# Altium PCB Camera-Sensor-Project.PcbDoc (part 1 of 2)
Units mm, origin at the board's own origin, x right, y up, seen from the top; angles counter-clockwise.
Board outline 82.2 x 56.7 mm, 8 copper layers (Top Layer, Layer 1, Layer 2, Layer 3, Layer 11, Layer 12, Layer 13, Layer 14), stack 1.544 mm thick; 45 components, 37 nets, 231 pads, 10 vias.
Unrouted connection lines stored in the file: 172.
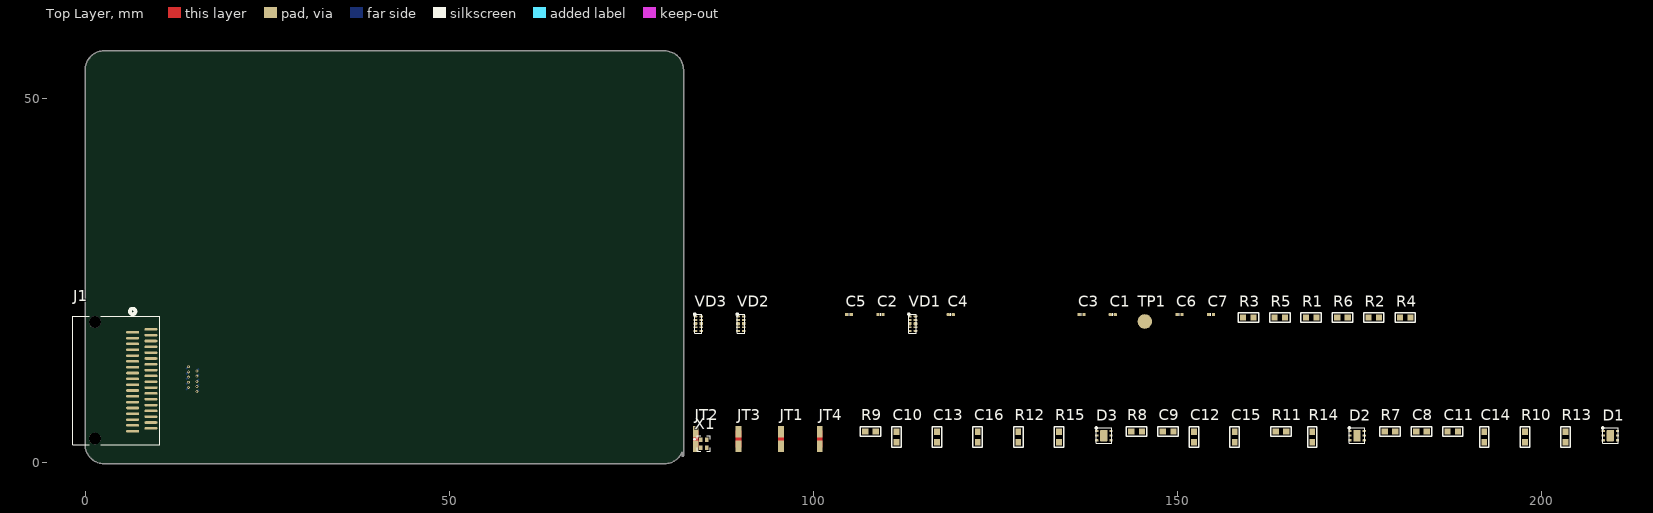
[diagram p0: Top Layer view]
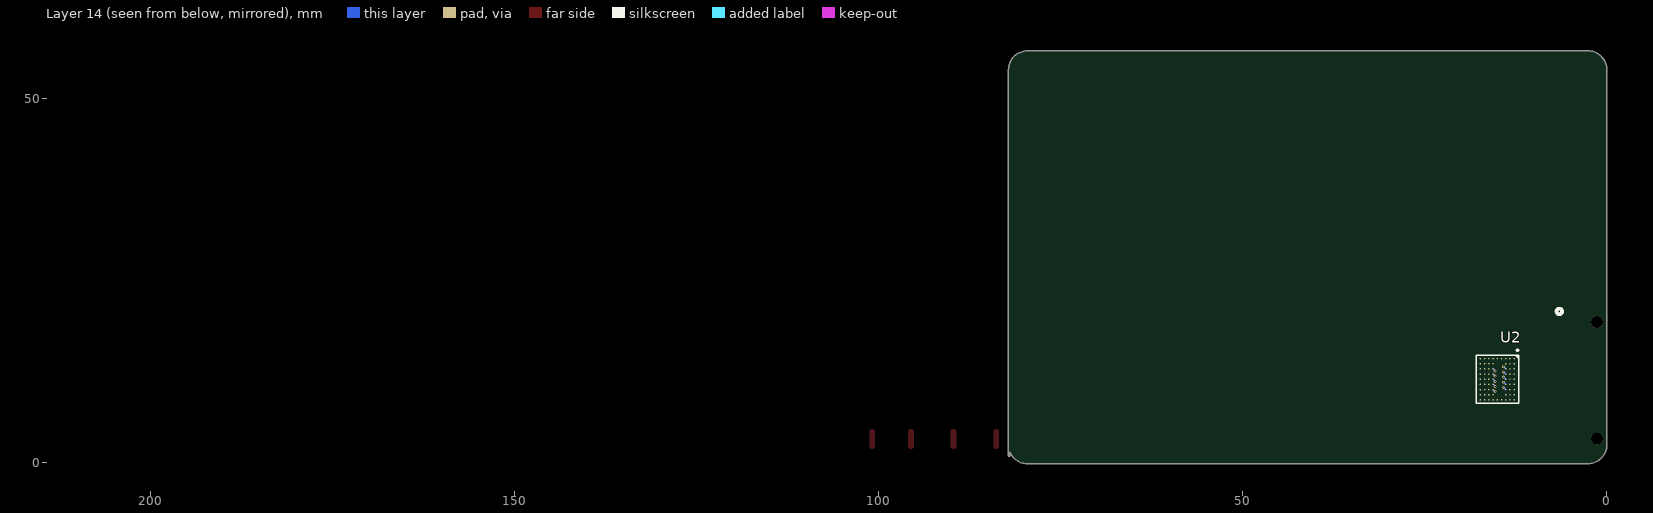
[diagram p1: Layer 14 view, seen from below]

## Layer stack, top to bottom
Board Layer Stack Top Solder: solder mask 0.0254, SM-001, Dk 4
Top Layer: signal copper 0.018
Dielectric 1: prepreg 0.125, FR4 HiTg170 2116, Dk 5.1
Layer 1: signal copper 0.018
Dielectric 4: core 0.3, FR4 HiTg170, Dk 4.5
Layer 2: signal copper 0.018
Dielectric 5: prepreg 0.125, FR4 HiTg170 2116, Dk 5.1
Layer 3: signal copper 0.018
Dielectric 2: core 0.3, FR4 HiTg170, Dk 4.5
Layer 11: signal copper 0.018
Dielectric 10: prepreg 0.125, FR4 HiTg170 2116, Dk 5.1
Layer 12: signal copper 0.018
Dielectric 11: core 0.3, FR4 HiTg170, Dk 4.5
Layer 13: signal copper 0.018
Dielectric 3: prepreg 0.125, FR4 HiTg170 2116, Dk 5.1
Layer 14: signal copper 0.018
Bottom Solder: solder mask 0.0254, SM-001, Dk 4

## Board outline
-0.1,2.499 -0.1,54 cw(c2.5,54) 2.5,56.6 22.25,56.6 79.5,56.6 cw(c79.5,54) 82.1,54 82.1,53.999 82.1,2.5 82.1,1 cw(c82,1) 81.9,1 81.9,1.498 cw(c79.5,2.5) 79.5,-0.1 2.501,-0.1 2.5,-0.1 cw(c2.5,2.5)

## Design rules (kind name [scope] priority, off if disabled: settings)
AcuteAngle [All] p1 off: minimum=3.50000000000000E+0001 checktracksonly=FALSE
AssemblyTestPointUsage "AssemblyTestPointUsage; Autogenerated; Do Not Use" [All] p1 off:
AssemblyTestPointUsage [All] p2:
AssemblyTestpoint "AssemblyTestpoint; Autogenerated; Do Not Use" [All] p1 off: testpointundercomponent=TRUE minsize=1.016 maxsize=2.54 preferedsize=1.524 minholesize=0 maxholesize=1.016 preferedholesize=0.813 testpointgrid=0.025 usegrid=TRUE gridtolerance=0 allowsidetop=TRUE allowsidebottom=TRUE
AssemblyTestpoint [All] p2: testpointundercomponent=TRUE minsize=1.016 maxsize=2.54 preferedsize=1.524 minholesize=0 maxholesize=1.016 preferedholesize=0.813 testpointgrid=0.025 usegrid=TRUE gridtolerance=0 allowsidetop=TRUE allowsidebottom=TRUE
BoardOutlineClearance "BoardOutlineClearance; Custom; Object: Silkscreen Layers; Constraints: 0mm" [OnLayer('Top Overlay') or OnLayer('Bottom Overlay')] p1: gap=0 ignorepadtopadclearanceinfootprint=FALSE
BoardOutlineClearance "BoardOutlineClearance; Rezonit; Advanced; Milling; Object: All" [All] p2: gap=0.25 ignorepadtopadclearanceinfootprint=FALSE
BoardOutlineClearance "BoardOutlineClearance; Rezonit; Advanced; V-Cut; Object: All" [All] p3 off: gap=0.4 ignorepadtopadclearanceinfootprint=FALSE
BoardOutlineClearance "BoardOutlineClearance; Rezonit; Standard; Milling; Object: OnLayer" [OnLayer('Top Overlay') or OnLayer('Bottom Overlay')] p4: gap=0 ignorepadtopadclearanceinfootprint=FALSE
BoardOutlineClearance "BoardOutlineClearance; Rezonit; Standard; Milling; Object: All" [All] p5 off: gap=0.25 ignorepadtopadclearanceinfootprint=FALSE
BoardOutlineClearance "BoardOutlineClearance; Rezonit; Standard; V-Cut; Object: All" [All] p6: gap=0.4 ignorepadtopadclearanceinfootprint=FALSE
Clearance "Clearance; Rezonit; Advanced; Object: Pad Non Plated" [(IsPad = True) and (PadIsPlated = 'False')] p1: gap=0 ignorepadtopadclearanceinfootprint=FALSE except(0.2: Arc-Hole Track-Hole SMDPad-Hole THPad-Hole Via-Hole Fill-Hole Poly-Hole Region-Hole Text-Hole)
Clearance "Clearance; Rezonit; Advanced; Copper: 105um; First Object: ExistsOnLayer; Second Object: ExistsOnLayer" [( ExistsOnLayer('105um Layer <N>') or ExistsOnLayer('105um Layer <M>') ) vs ( ExistsOnLayer('105um Layer <N>') or ExistsOnLayer('105um Layer <M>') )] p2 off: gap=0.35 ignorepadtopadclearanceinfootprint=FALSE except(0.25: Arc-Hole Track-Hole SMDPad-Hole THPad-Hole Via-Hole Fill-Hole Poly-Hole Region-Hole Text-Hole) // Through Hole Primitive to any other Primitive
Clearance "Clearance; Rezonit; Advanced; Copper: 70um; First Object: ExistsOnLayer; Second Object: ExistsOnLayer" [( ExistsOnLayer('70um Layer <N>') or ExistsOnLayer('70um Layer <M>') ) vs ( ExistsOnLayer('70um Layer <N>') or ExistsOnLayer('70um Layer <M>') )] p3 off: gap=0.3 ignorepadtopadclearanceinfootprint=FALSE except(0.25: Arc-Hole Track-Hole SMDPad-Hole THPad-Hole Via-Hole Fill-Hole Poly-Hole Region-Hole Text-Hole) // Through Hole Primitive to any other Primitive
Clearance "Clearance; Custom; First Object: InPolygon & StitchingVia; Second Object: Nets; Constraints: 0.6mm" [InPolygon or IsStitchingVia vs InDifferentialPairClass('DifferentialPairClassName') or InNetClass('NetClassName')] p4: gap=0.2 ignorepadtopadclearanceinfootprint=FALSE except(0: Arc-Arc Arc-Track Arc-SMDPad Arc-THPad Arc-Text Arc-Hole Track-Track Track-SMDPad Track-THPad Track-Text Track-Hole SMDPad-SMDPad SMDPad-THPad SMDPad-Text SMDPad-Hole THPad-THPad THPad-Text THPad-Hole Text-Text Text-Hole; 0.125: SMDPad-Via THPad-Via Via-Via Via-Text; 0.25: Via-Hole Fill-Hole Poly-Hole Region-Hole; 0.6: Arc-Via Arc-Fill Arc-Poly Arc-Region Track-Via Track-Fill Track-Poly Track-Region) // 18um example
Clearance "Clearance; Rezonit; Advanced; Copper: 35um; First Object: ExistsOnLayer; Second Object: ExistsOnLayer" [( ExistsOnLayer('35um Layer <N>') or ExistsOnLayer('35um Layer <M>') ) vs ( ExistsOnLayer('35um Layer <N>') or ExistsOnLayer('35um Layer <M>') )] p5 off: gap=0.2 ignorepadtopadclearanceinfootprint=FALSE except(0.15: Arc-Arc Arc-Track Arc-SMDPad Arc-THPad Arc-Via Arc-Text Track-Track Track-SMDPad Track-THPad Track-Via Track-Text SMDPad-SMDPad SMDPad-THPad SMDPad-Via SMDPad-Text THPad-THPad THPad-Via THPad-Text Via-Via Via-Text Text-Text; 0.25: Arc-Hole Track-Hole SMDPad-Hole THPad-Hole Via-Hole Fill-Hole Poly-Hole Region-Hole Text-Hole) // Through Hole Primitive to any other Primitive
Clearance "Clearance; Custom; First Object: Keepout; Second Object: All; Constraints: 0.01mm" [All vs IsKeepOut] p6: gap=0.01 ignorepadtopadclearanceinfootprint=FALSE
Clearance "Clearance; Rezonit; Advanced; Copper: 18um; First Object: ExistsOnLayer; Second Object: ExistsOnLayer" [All] p7: gap=0.15 ignorepadtopadclearanceinfootprint=FALSE except(0.1: Arc-Arc Arc-Track Arc-SMDPad Arc-THPad Arc-Via Arc-Text Track-Track Track-SMDPad Track-THPad Track-Via Track-Text SMDPad-SMDPad SMDPad-THPad SMDPad-Via SMDPad-Text THPad-THPad THPad-Via THPad-Text Via-Via Via-Text Text-Text; 0.25: Arc-Hole Track-Hole SMDPad-Hole THPad-Hole Via-Hole Fill-Hole Poly-Hole Region-Hole Text-Hole) // Through Hole Primitive to any other Primitive
Clearance "Clearance; Rezonit; Standard; Object: Pad Non Plated" [(IsPad = True) and (PadIsPlated = 'False')] p8: gap=0 ignorepadtopadclearanceinfootprint=FALSE except(0.2: Arc-Hole Track-Hole SMDPad-Hole THPad-Hole Via-Hole Fill-Hole Poly-Hole Region-Hole Text-Hole)
Clearance "Clearance; Rezonit; Standard; Copper: 105um; First Object: ExistsOnLayer; Second Object: ExistsOnLayer" [( ExistsOnLayer('105um Layer 1') or ExistsOnLayer('105um Layer 2') ) vs ( ExistsOnLayer('105um Layer 1') or ExistsOnLayer('105um Layer 2') )] p9 off: gap=0.35 ignorepadtopadclearanceinfootprint=FALSE except(0.25: Arc-Hole Track-Hole SMDPad-Hole THPad-Hole Via-Hole Fill-Hole Poly-Hole Region-Hole Text-Hole) // Through Hole Primitive to any other Primitive
Clearance "Clearance; Rezonit; Standard; Copper: 70um; First Object: ExistsOnLayer; Second Object: ExistsOnLayer" [( ExistsOnLayer('70um Layer 1') or ExistsOnLayer('70um Layer 2') ) vs ( ExistsOnLayer('70um Layer 1') or ExistsOnLayer('70um Layer 2') )] p10 off: gap=0.3 ignorepadtopadclearanceinfootprint=FALSE except(0.25: Arc-Hole Track-Hole SMDPad-Hole THPad-Hole Via-Hole Fill-Hole Poly-Hole Region-Hole Text-Hole) // Through Hole Primitive to any other Primitive
Clearance "Clearance; Rezonit; Standard; Copper: 35um; First Object: ExistsOnLayer; Second Object: ExistsOnLayer" [( ExistsOnLayer('35um Layer 1') or ExistsOnLayer('35um Layer 2') ) vs ( ExistsOnLayer('35um Layer 1') or ExistsOnLayer('35um Layer 2') )] p11 off: gap=0.2 ignorepadtopadclearanceinfootprint=FALSE except(0.25: Arc-Hole Track-Hole SMDPad-Hole THPad-Hole Via-Hole Fill-Hole Poly-Hole Region-Hole Text-Hole) // Through Hole Primitive to any other Primitive
Clearance "Clearance; Rezonit; Standard; Copper: 18um; First Object: ExistsOnLayer; Second Object: ExistsOnLayer" [( ExistsOnLayer('18um Layer 1') or ExistsOnLayer('18um Layer 2') ) vs ( ExistsOnLayer('18um Layer 1') or ExistsOnLayer('18um Layer 2') )] p12: gap=0.2 ignorepadtopadclearanceinfootprint=FALSE except(0.125: Arc-Arc Arc-Track Arc-SMDPad Arc-THPad Arc-Via Arc-Text Track-Track Track-SMDPad Track-THPad Track-Via Track-Text SMDPad-SMDPad SMDPad-THPad SMDPad-Via SMDPad-Text THPad-THPad THPad-Via THPad-Text Via-Via Via-Text Text-Text; 0.25: Arc-Hole Track-Hole SMDPad-Hole THPad-Hole Via-Hole Fill-Hole Poly-Hole Region-Hole Text-Hole) // Through Hole Primitive to any other Primitive
ComponentClearance "ComponentClearance; Rezonit; Autoassembly; Object: All" [All] p1: gap=0.2 collisioncheckmode=3 verticalgap=0.2 showdistances=FALSE
ComponentClearance "ComponentClearance; Rezonit; Autoassembly" [All] p2: gap=0.2 collisioncheckmode=3 verticalgap=0.2 showdistances=FALSE
Creepage "Creepage; Autogenerated; Do Not Use" [All] p1 off: checkdistance=0.254 applytopolygonpour=TRUE
Creepage [All] p2 off: checkdistance=0.254 applytopolygonpour=TRUE
DiffPairsRouting "DiffPairsRouting; Autogenerated; Do Not Use" [All] p1 off: maxlimit=0.254 minlimit=0.254 mostfreqgap=0.254 toplayer_minwidth=0.381 toplayer_maxwidth=0.381 toplayer_prefwidth=0.381 midlayer1_minwidth=0.381 midlayer1_maxwidth=0.381 midlayer1_prefwidth=0.381 midlayer2_minwidth=0.381 midlayer2_maxwidth=0.381 midlayer2_prefwidth=0.381 midlayer6_minwidth=0.381 midlayer6_maxwidth=0.381 midlayer6_prefwidth=0.381 midlayer10_minwidth=0.381 midlayer10_maxwidth=0.381 midlayer10_prefwidth=0.381 midlayer11_minwidth=0.381 midlayer11_maxwidth=0.381 midlayer11_prefwidth=0.381 midlayer12_minwidth=0.381 midlayer12_maxwidth=0.381 midlayer12_prefwidth=0.381 bottomlayer_minwidth=0.381 bottomlayer_maxwidth=0.381 bottomlayer_prefwidth=0.381 maxuncoupledlength=12.7
DiffPairsRouting [All] p2: maxlimit=0.254 minlimit=0.254 mostfreqgap=0.254 toplayer_minwidth=0.381 toplayer_maxwidth=0.381 toplayer_prefwidth=0.381 midlayer1_minwidth=0.381 midlayer1_maxwidth=0.381 midlayer1_prefwidth=0.381 midlayer2_minwidth=0.381 midlayer2_maxwidth=0.381 midlayer2_prefwidth=0.381 midlayer6_minwidth=0.381 midlayer6_maxwidth=0.381 midlayer6_prefwidth=0.381 midlayer10_minwidth=0.381 midlayer10_maxwidth=0.381 midlayer10_prefwidth=0.381 midlayer11_minwidth=0.381 midlayer11_maxwidth=0.381 midlayer11_prefwidth=0.381 midlayer12_minwidth=0.381 midlayer12_maxwidth=0.381 midlayer12_prefwidth=0.381 bottomlayer_minwidth=0.381 bottomlayer_maxwidth=0.381 bottomlayer_prefwidth=0.381 maxuncoupledlength=12.7
FabricationTestPointUsage "FabricationTestPointUsage; Autogenerated; Do Not Use" [All] p1 off: valid=0 allowmultiple=FALSE
FabricationTestPointUsage [All] p2: valid=0 allowmultiple=FALSE
FabricationTestpoint "FabricationTestpoint; Autogenerated; Do Not Use" [All] p1 off: side=3 testpointundercomponent=TRUE minsize=1.016 maxsize=2.54 preferedsize=1.524 minholesize=0 maxholesize=1.016 preferedholesize=0.813 testpointgrid=0.025 allowsidetop=TRUE allowsidebottom=TRUE usegrid=TRUE gridtolerance=0
FabricationTestpoint [All] p2: side=3 testpointundercomponent=TRUE minsize=1.016 maxsize=2.54 preferedsize=1.524 minholesize=0 maxholesize=1.016 preferedholesize=0.813 testpointgrid=0.025 allowsidetop=TRUE allowsidebottom=TRUE usegrid=TRUE gridtolerance=0
FanoutControl "Fanout_BGA; Autogenerated; Do Not Use" [IsBGA] p1 off: bgadir=Out bgaviamode=Centered fanoutstyle=Auto fanoutdirection=Alternating viagrid=0.025 // Fanout_BGA (Default Rule)
FanoutControl "Fanout_LCC; Autogenerated; Do Not Use" [IsLCC] p2 off: bgadir=Out bgaviamode=Centered fanoutstyle=Auto fanoutdirection=Alternating viagrid=0.025 // Fanout_LCC (Default Rule)
FanoutControl "Fanout_SOIC; Autogenerated; Do Not Use" [IsSOIC] p3 off: bgadir=Out bgaviamode=Centered fanoutstyle=Auto fanoutdirection=Alternating viagrid=0.025 // Fanout_SOIC (Default Rule)
FanoutControl "Fanout_Small; Autogenerated; Do Not Use" [(CompPinCount < 5)] p4 off: bgadir=Out bgaviamode=Centered fanoutstyle=Auto fanoutdirection=OutThenIn viagrid=0.025 // Fanout_Small (Default Rule)
FanoutControl "Fanout_Default; Autogenerated; Do Not Use" [All] p5 off: bgadir=Out bgaviamode=Centered fanoutstyle=BGA fanoutdirection=Alternating viagrid=0.025 // Fanout_Default (Default Rule)
FanoutControl Fanout_BGA [IsBGA] p6: bgadir=Out bgaviamode=Centered fanoutstyle=Auto fanoutdirection=Alternating viagrid=0.025 // Fanout_BGA (Default Rule)
FanoutControl Fanout_LCC [IsLCC] p7: bgadir=Out bgaviamode=Centered fanoutstyle=Auto fanoutdirection=Alternating viagrid=0.025 // Fanout_LCC (Default Rule)
FanoutControl Fanout_SOIC [IsSOIC] p8: bgadir=Out bgaviamode=Centered fanoutstyle=Auto fanoutdirection=Alternating viagrid=0.025 // Fanout_SOIC (Default Rule)
FanoutControl Fanout_Small [(CompPinCount < 5)] p9: bgadir=Out bgaviamode=Centered fanoutstyle=Auto fanoutdirection=OutThenIn viagrid=0.025 // Fanout_Small (Default Rule)
FanoutControl Fanout_Default [All] p10: bgadir=Out bgaviamode=Centered fanoutstyle=BGA fanoutdirection=Alternating viagrid=0.025 // Fanout_Default (Default Rule)
Height "Height; Autogenerated; Do Not Use" [All] p1 off: minheight=0 maxheight=25.4 prefheight=12.7
Height [All] p2: minheight=0 maxheight=25.4 prefheight=12.7
HoleSize "HoleSize; Rezonit; Advanced; Object: Blind/Buried VIA" [(ObjectKind = 'Via') And (DrillPair <> 'Layer Top Layer - Layer Bottom Layer')] p1: absolutevalues=TRUE maxlimit=0.5 minlimit=0.2 maxpercent=80.000 minpercent=20.000
HoleSize "HoleSize; Rezonit; Advanced; Object: VIA" [IsVia] p2: absolutevalues=TRUE maxlimit=5 minlimit=0.2 maxpercent=80.000 minpercent=20.000
HoleSize "HoleSize; Rezonit; Advanced; Object: Pad Non Plated" [(IsPad = True) and (PadIsPlated = 'False')] p3: absolutevalues=TRUE maxlimit=5 minlimit=0.5 maxpercent=80.000 minpercent=20.000
HoleSize "HoleSize; Rezonit; Advanced; Object: Pad Plated" [(IsPad = True) and (PadIsPlated = 'True')] p4: absolutevalues=TRUE maxlimit=5 minlimit=0.6 maxpercent=80.000 minpercent=20.000
HoleSize "HoleSize; Rezonit; Standard; Object: VIA" [IsVia] p5: absolutevalues=TRUE maxlimit=5.9 minlimit=0.3 maxpercent=80.000 minpercent=20.000
HoleSize "HoleSize; Rezonit; Standard; Object: Pad Non Plated" [(IsPad = True) and (PadIsPlated = 'False')] p6: absolutevalues=TRUE maxlimit=5.9 minlimit=0.5 maxpercent=80.000 minpercent=20.000
HoleSize "HoleSize; Rezonit; Standard; Object: Pad Plated" [(IsPad = True) and (PadIsPlated = 'True')] p7: absolutevalues=TRUE maxlimit=5.9 minlimit=0.6 maxpercent=80.000 minpercent=20.000
HoleToHoleClearance "HoleToHoleClearance; Rezonit; Advanced" [All] p1: gap=0.2 allowstackedmicrovias=TRUE
HoleToHoleClearance "HoleToHoleClearance; Rezonit; Standard" [All] p2: gap=0.2 allowstackedmicrovias=TRUE
LayerPairs "LayerPairs; Autogenerated; Do Not Use" [All] p1 off: enforce=TRUE
LayerPairs [All] p2: enforce=TRUE
MinimumAnnularRing "MinimumAR; Rezonit; Advanced; Object: VIA" [IsVia] p1: minimumring=0.1
MinimumAnnularRing "MinimumAR; Rezonit; Advanced; Object: Pad Plated" [(IsPad = True) and (PadIsPlated = 'True')] p2: minimumring=0.15
MinimumAnnularRing "MinimumAR; Rezonit; Standard; Object: VIA" [IsVia] p3: minimumring=0.15
MinimumAnnularRing "MinimumAR; Rezonit; Standard; Object: Pad Plated" [(IsPad = True) and (PadIsPlated = 'True')] p4: minimumring=0.2
MinimumSolderMaskSliver "SolderMaskBridge; Rezonit; Advanced; Green; Copper: 105um; First Object: ExistsOnLayer; Second Object: ExistsOnLayer" [ExistsOnLayer('105um Layer Top or Bottom') or ExistsOnLayer('105um Layer Bottom or Top') vs ExistsOnLayer('105um Layer Top or Bottom') or ExistsOnLayer('105um Layer Bottom or Top')] p1 off: minsoldermaskwidth=0.15 // Dk=3.5
MinimumSolderMaskSliver "SolderMaskBridge; Rezonit; Advanced; Green; Copper: 70um; First Object: ExistsOnLayer; Second Object: ExistsOnLayer" [ExistsOnLayer('70um Layer Top or Bottom') or ExistsOnLayer('70um Layer Bottom or Top') vs ExistsOnLayer('70um Layer Top or Bottom') or ExistsOnLayer('70um Layer Bottom or Top')] p2 off: minsoldermaskwidth=0.15 // Dk=3.5
MinimumSolderMaskSliver "SolderMaskBridge; Rezonit; Advanced; Green; Copper: 35um; First Object: ExistsOnLayer; Second Object: ExistsOnLayer" [ExistsOnLayer('35um Layer Top or Bottom') or ExistsOnLayer('35um Layer Bottom or Top') vs ExistsOnLayer('35um Layer Top or Bottom') or ExistsOnLayer('35um Layer Bottom or Top')] p3 off: minsoldermaskwidth=0.1 // Dk=3.5
MinimumSolderMaskSliver "SolderMaskBridge; Rezonit; Advanced; Green; Copper: 18um; First Object: ExistsOnLayer; Second Object: ExistsOnLayer" [ExistsOnLayer('18um Layer Top or Bottom') or ExistsOnLayer('18um Layer Bottom or Top') vs ExistsOnLayer('18um Layer Top or Bottom') or ExistsOnLayer('18um Layer Bottom or Top')] p4: minsoldermaskwidth=0.1 // Dk=3.5
MinimumSolderMaskSliver "SolderMaskBridge; Rezonit; Advanced; Color; Copper: 105um; First Object: ExistsOnLayer; Second Object: ExistsOnLayer" [ExistsOnLayer('105um Layer Top or Bottom') or ExistsOnLayer('105um Layer Bottom or Top') vs ExistsOnLayer('105um Layer Top or Bottom') or ExistsOnLayer('105um Layer Bottom or Top')] p5 off: minsoldermaskwidth=0.175 // Dk=3.5
MinimumSolderMaskSliver "SolderMaskBridge; Rezonit; Advanced; Color; Copper: 70um; First Object: ExistsOnLayer; Second Object: ExistsOnLayer" [ExistsOnLayer('70um Layer Top or Bottom') or ExistsOnLayer('70um Layer Bottom or Top') vs ExistsOnLayer('70um Layer Top or Bottom') or ExistsOnLayer('70um Layer Bottom or Top')] p6 off: minsoldermaskwidth=0.175 // Dk=3.5
MinimumSolderMaskSliver "SolderMaskBridge; Rezonit; Advanced; Color; Copper: 35um; First Object: ExistsOnLayer; Second Object: ExistsOnLayer" [ExistsOnLayer('35um Layer Top or Bottom') or ExistsOnLayer('35um Layer Bottom or Top') vs ExistsOnLayer('35um Layer Top or Bottom') or ExistsOnLayer('35um Layer Bottom or Top')] p7 off: minsoldermaskwidth=0.15 // Dk=3.5
MinimumSolderMaskSliver "SolderMaskBridge; Rezonit; Advanced; Color; Copper: 18um; First Object: ExistsOnLayer; Second Object: ExistsOnLayer" [ExistsOnLayer('18um Layer Top or Bottom') or ExistsOnLayer('18um Layer Bottom or Top') vs ExistsOnLayer('18um Layer Top or Bottom') or ExistsOnLayer('18um Layer Bottom or Top')] p8 off: minsoldermaskwidth=0.15 // Dk=3.5
MinimumSolderMaskSliver "SolderMaskBridge; Rezonit; Standard; Green; Copper: 105um; First Object: ExistsOnLayer; Second Object: ExistsOnLayer" [ExistsOnLayer('105um Layer Top or Bottom') or ExistsOnLayer('105um Layer Bottom or Top') vs ExistsOnLayer('105um Layer Top or Bottom') or ExistsOnLayer('105um Layer Bottom or Top')] p9 off: minsoldermaskwidth=0.175
MinimumSolderMaskSliver "SolderMaskBridge; Rezonit; Standard; Green; Copper: 70um; First Object: ExistsOnLayer; Second Object: ExistsOnLayer" [ExistsOnLayer('70um Layer Top or Bottom') or ExistsOnLayer('70um Layer Bottom or Top') vs ExistsOnLayer('70um Layer Top or Bottom') or ExistsOnLayer('70um Layer Bottom or Top')] p10 off: minsoldermaskwidth=0.175
MinimumSolderMaskSliver "SolderMaskBridge; Rezonit; Standard; Green; Copper: 35um; First Object: ExistsOnLayer; Second Object: ExistsOnLayer" [ExistsOnLayer('35um Layer Top or Bottom') or ExistsOnLayer('35um Layer Bottom or Top') vs ExistsOnLayer('35um Layer Top or Bottom') or ExistsOnLayer('35um Layer Bottom or Top')] p11 off: minsoldermaskwidth=0.15
MinimumSolderMaskSliver "SolderMaskBridge; Rezonit; Standard; Green; Copper: 18um; First Object: ExistsOnLayer; Second Object: ExistsOnLayer" [ExistsOnLayer('18um Layer Top or Bottom') or ExistsOnLayer('18um Layer Bottom or Top') vs ExistsOnLayer('18um Layer Top or Bottom') or ExistsOnLayer('18um Layer Bottom or Top')] p12: minsoldermaskwidth=0.15
MinimumSolderMaskSliver "SolderMaskBridge; Rezonit; Standard; Color; Copper: 105um; First Object: ExistsOnLayer; Second Object: ExistsOnLayer" [ExistsOnLayer('105um Layer Top or Bottom') or ExistsOnLayer('105um Layer Bottom or Top') vs ExistsOnLayer('105um Layer Top or Bottom') or ExistsOnLayer('105um Layer Bottom or Top')] p13 off: minsoldermaskwidth=0.175
MinimumSolderMaskSliver "SolderMaskBridge; Rezonit; Standard; Color; Copper: 70um; First Object: ExistsOnLayer; Second Object: ExistsOnLayer" [ExistsOnLayer('70um Layer Top or Bottom') or ExistsOnLayer('70um Layer Bottom or Top') vs ExistsOnLayer('70um Layer Top or Bottom') or ExistsOnLayer('70um Layer Bottom or Top')] p14 off: minsoldermaskwidth=0.175
MinimumSolderMaskSliver "SolderMaskBridge; Rezonit; Standard; Color; Copper: 35um; First Object: ExistsOnLayer; Second Object: ExistsOnLayer" [ExistsOnLayer('35um Layer Top or Bottom') or ExistsOnLayer('35um Layer Bottom or Top') vs ExistsOnLayer('35um Layer Top or Bottom') or ExistsOnLayer('35um Layer Bottom or Top')] p15 off: minsoldermaskwidth=0.15
MinimumSolderMaskSliver "SolderMaskBridge; Rezonit; Standard; Color; Copper: 18um; First Object: ExistsOnLayer; Second Object: ExistsOnLayer" [ExistsOnLayer('18um Layer Top or Bottom') or ExistsOnLayer('18um Layer Bottom or Top') vs ExistsOnLayer('18um Layer Top or Bottom') or ExistsOnLayer('18um Layer Bottom or Top')] p16 off: minsoldermaskwidth=0.15
NetAntennae "NetAntennae; Custom; Object: All; Constraints: 0mm" [All] p1: netantennaetolerance=0
NetAntennae [All] p2: netantennaetolerance=0
PasteMaskExpansion "PasteMaskExpansion; Custom; Object: Multi-Layer; Constraints: No Paste" [OnLayer('Multi-Layer')] p1: expansion=-2539.975 usepaste=FALSE
PasteMaskExpansion "PasteMaskExpansion; Custom; Object: Test Points; Constraints: No Paste" [(ObjectKind = 'Pad') And ((TestpointAssyTop = 'True') Or (TestpointAssyBottom = 'True'))] p2: expansion=-2539.975 usepaste=FALSE
PasteMaskExpansion "PasteMaskExpansion; Custom; Object: All; Constrains: 100%" [All] p3: expansion=0
PasteMaskExpansion "PasteMaskExpansion; Custom; Object: EPAD; Constraints: -50%" [HasPad('*EPAD')] p4: expansion=0 percent=-50.000000
PasteMaskExpansion [All] p5: expansion=0
PlaneClearance "PlaneClearance; Autogenerated; Do Not Use" [All] p1 off: clearance=0.508
PlaneClearance [All] p2: clearance=0.5
PlaneConnect "PlaneConnect; Autogenerated; Do Not Use" [All] p1 off: planeconnectstyle=Relief reliefexpansion=0.508 reliefentries=4 reliefconductorwidth=0.254 reliefairgap=0.254
PlaneConnect [All] p2 off: planeconnectstyle=Relief reliefexpansion=0.508 reliefentries=4 reliefconductorwidth=0.254 reliefairgap=0.254
PolygonConnect "PolygonConnect; Rezonit; Advanced; Copper: 105um; First Object: All; Second Object: InPolygon & ExistsOnLayer" [All vs IsPolygon and ( ExistsOnLayer('105um Layer <N>') or ExistsOnLayer('105um Layer <M>') )] p1 off: connectstyle=Relief reliefconductorwidth=0.35 reliefentries=4 polygonreliefangle="90 Angle" airgapwidth=0.35
PolygonConnect "PolygonConnect; Rezonit; Advanced; Copper: 70um; First Object: All; Second Object: InPolygon & ExistsOnLayer" [All vs IsPolygon and ( ExistsOnLayer('70um Layer <N>') or ExistsOnLayer('70um Layer <M>') )] p2 off: connectstyle=Relief reliefconductorwidth=0.3 reliefentries=4 polygonreliefangle="90 Angle" airgapwidth=0.3
PolygonConnect "PolygonConnect; Rezonit; Advanced; Copper: 35um; First Object: All; Second Object: InPolygon & ExistsOnLayer" [All vs IsPolygon and ( ExistsOnLayer('35um Layer <N>') or ExistsOnLayer('35um Layer <M>') )] p3 off: connectstyle=Relief reliefconductorwidth=0.15 reliefentries=4 polygonreliefangle="90 Angle" airgapwidth=0.2
PolygonConnect "PolygonConnect; Custom; First Object: VIA; Constraints: Direct Connect" [IsVia] p4: connectstyle=Direct reliefconductorwidth=0.254 reliefentries=4 polygonreliefangle="90 Angle" airgapwidth=0.254
PolygonConnect "PolygonConnect; Rezonit; Advanced; Copper: 18um; First Object: All; Second Object: InPolygon & ExistsOnLayer" [All vs OnOutside] p5: connectstyle=Relief reliefconductorwidth=0.2 reliefentries=4 polygonreliefangle="90 Angle" airgapwidth=0.15
PolygonConnect "PolygonConnect; Rezonit; Standard; Copper: 105um; First Object: All; Second Object: InPolygon & ExistsOnLayer" [All vs IsPolygon and ( ExistsOnLayer('105um Layer 1') or ExistsOnLayer('105um Layer 2') )] p6 off: connectstyle=Relief reliefconductorwidth=0.35 reliefentries=4 polygonreliefangle="90 Angle" airgapwidth=0.35
PolygonConnect "PolygonConnect; Rezonit; Standard; Copper: 70um; First Object: All; Second Object: InPolygon & ExistsOnLayer" [All vs IsPolygon and ( ExistsOnLayer('70um Layer 1') or ExistsOnLayer('70um Layer 2') )] p7 off: connectstyle=Relief reliefconductorwidth=0.3 reliefentries=4 polygonreliefangle="90 Angle" airgapwidth=0.3
PolygonConnect "PolygonConnect; Rezonit; Standard; Copper: 35um; First Object: All; Second Object: InPolygon & ExistsOnLayer" [All vs IsPolygon and ( ExistsOnLayer('35um Layer 1') or ExistsOnLayer('35um Layer 2') )] p8 off: connectstyle=Relief reliefconductorwidth=0.2 reliefentries=4 polygonreliefangle="90 Angle" airgapwidth=0.2
PolygonConnect "PolygonConnect; Rezonit; Standard; Copper: 18um; First Object: All; Second Object: InPolygon & ExistsOnLayer" [All vs IsPolygon] p9: connectstyle=Relief reliefconductorwidth=0.125 reliefentries=4 polygonreliefangle="90 Angle" airgapwidth=0.2
ReturnPath "ReturnPath; Custom; Object: DifferentialPair; Constraints: 0.5mm" [IsDifferentialPair] p1: impedanceprofileid={0401EAB5-FD93-4387-B60E-8506D355F572} _gaplimit=0.5 _useantipads=TRUE
RoutingCorners "RoutingCorners; Autogenerated; Do Not Use" [All] p1 off: cornerstyle=45-Degree minsetback=2.54 maxsetback=2.54
RoutingCorners [All] p2 off: cornerstyle=45-Degree minsetback=2.54 maxsetback=2.54
RoutingLayers "RoutingLayers; Autogenerated; Do Not Use" [All] p1 off: top layer_v5=TRUE mid layer 1_v5=TRUE mid layer 2_v5=TRUE mid layer 6_v5=TRUE mid layer 10_v5=TRUE mid layer 11_v5=TRUE mid layer 12_v5=TRUE bottom layer_v5=TRUE
RoutingLayers [All] p2: top layer_v5=TRUE mid layer 1_v5=TRUE mid layer 2_v5=TRUE mid layer 6_v5=TRUE mid layer 10_v5=TRUE mid layer 11_v5=TRUE mid layer 12_v5=TRUE bottom layer_v5=TRUE
RoutingPriority "RoutingPriority; Autogenerated; Do Not Use" [All] p1 off: routingpriority=0
RoutingPriority [All] p2: routingpriority=0
RoutingTopology "RoutingTopology; Custom; Object: All; Topology: Shortest" [All] p1: topology=Shortest
RoutingTopology [All] p2: topology=Shortest
RoutingVias "RoutingVias; Rezonit; Advanced; Object: VIA; Constraints: 0.2x0.4mm" [isVia] p1: holewidth=0.2 width=0.4 viastyle="Through Hole" minholewidth=0.2 minwidth=0.4 maxholewidth=5 maxwidth=5.2
RoutingVias "RoutingVias; Rezonit; Advanced; Object: All; Constraints: 0.2x0.4mm" [All] p2: holewidth=0.2 width=0.4 viastyle="Through Hole" minholewidth=0.2 minwidth=0.4 maxholewidth=5 maxwidth=5.2 // Fanout bug
RoutingVias "RoutingVias; Rezonit; Standard; Object: VIA; Constraints: 0.3x0.6mm" [isVia] p3: holewidth=0.3 width=0.6 viastyle="Through Hole" minholewidth=0.3 minwidth=0.6 maxholewidth=1 maxwidth=1.6
RoutingVias "RoutingVias; Rezonit; Standard; Object: All; Constraints: 0.3x0.6mm" [All] p4: holewidth=0.3 width=0.6 viastyle="Through Hole" minholewidth=0.3 minwidth=0.6 maxholewidth=1 maxwidth=1.6 // Fanout bug
SMDEntry "SMDEntry; Custom; Object: All; Constraints: All Allowed" [All] p1: side=TRUE corner=TRUE anyangle=TRUE
SMDEntry [All] p2: side=TRUE corner=TRUE anyangle=TRUE
SMDNeckDown "SMDNeckDown; Custom; Object: All; Constraints: 50%" [All] p1: percent=100.000
SMDNeckDown [All] p2: percent=50.000
SMDToCorner "SMDToCorner; Custom; Object: All; Constraints: 0mm" [All] p1: distance=0
SMDToCorner [All] p2: distance=0
SMDToPlane "SMDToPlane; Custom; Object: All; Constraints: 0mm" [All] p1: distance=0
SMDToPlane [All] p2: distance=0
ShortCircuit "ShortCircuit; Custom; Constraints: No Short Circuit" [All] p1: allowed=FALSE
ShortCircuit [All] p2: allowed=FALSE
SilkToSilkClearance "SilkToSilkClearance; Rezonit; Object: All" [All] p1: silktosilkclearance=0.15
SilkToSilkClearance "SilkToSilkClearance; Rezonit" [All] p2 off: silktosilkclearance=0.15
SilkToSolderMaskClearance "SilkToSolderMaskClearance; Rezonit" [All] p1: minsilkscreentomaskgap=0.05 clearancetoexposedcopper=FALSE
SilkToSolderMaskClearance [All] p2: minsilkscreentomaskgap=0 clearancetoexposedcopper=FALSE
SolderMaskExpansion "SolderMaskExpansion; Rezonit; Advanced; Green, Blue, Red; Copper: 105um; Object: Pad Non Plated" [(IsPad = True) and (PadIsPlated = 'False')] p1 off: expansion=0.05 istentingtop=FALSE soldermaskfromhole=TRUE // Enable 1 of 4 Rules
SolderMaskExpansion "SolderMaskExpansion; Rezonit; Advanced; Green, Blue, Red; Copper: 70um; Object: Pad Non Plated" [(IsPad = True) and (PadIsPlated = 'False')] p2 off: expansion=0.05 istentingtop=FALSE soldermaskfromhole=TRUE // Enable 1 of 4 Rules
SolderMaskExpansion "SolderMaskExpansion; Rezonit; Advanced; Green, Blue, Red; Copper: 35um; Object: Pad Non Plated" [(IsPad = True) and (PadIsPlated = 'False')] p3 off: expansion=0.025 istentingtop=FALSE soldermaskfromhole=TRUE // Enable 1 of 4 Rules
SolderMaskExpansion "SolderMaskExpansion; Rezonit; Advanced; Green, Blue, Red; Copper: 18um; Object: Pad Non Plated" [(IsPad = True) and (PadIsPlated = 'False')] p4: expansion=0.025 istentingtop=FALSE soldermaskfromhole=TRUE // Enable 1 of 4 Rules
SolderMaskExpansion "SolderMaskExpansion; Rezonit; Advanced; Green, Blue, Red; Copper: 105um; Object: Multi-Layer" [OnLayer('Multi-Layer')] p5 off: expansion=0.05 istentingtop=FALSE // Multi-Layer bug; Enable 1 of 4 Rules; Enable 1 of 4 Rules
SolderMaskExpansion "SolderMaskExpansion; Rezonit; Advanced; Green, Blue, Red; Copper: 70um; Object: Multi-Layer" [OnLayer('Multi-Layer')] p6 off: expansion=0.05 istentingtop=FALSE // Multi-Layer bug; Enable 1 of 4 Rules
SolderMaskExpansion "SolderMaskExpansion; Rezonit; Advanced; Green, Blue, Red; Copper: 35um; Object: Multi-Layer" [OnLayer('Multi-Layer')] p7 off: expansion=0.025 istentingtop=FALSE // Multi-Layer bug; Enable 1 of 4 Rules
SolderMaskExpansion "SolderMaskExpansion; Rezonit; Advanced; Green, Blue, Red; Copper: 18um; Object: Multi-Layer" [OnLayer('Multi-Layer')] p8: expansion=0.025 istentingtop=FALSE // Multi-Layer bug; Enable 1 of 4 Rules
SolderMaskExpansion "SolderMaskExpansion; Rezonit; Advanced; Green, Blue, Red; Copper: 105um; Object: ExistsOnLayer" [ExistsOnLayer('105um Layer Top or Bottom') or ExistsOnLayer('105um Layer Bottom or Top')] p9 off: expansion=0.05 istentingtop=FALSE
SolderMaskExpansion "SolderMaskExpansion; Rezonit; Advanced; Green, Blue, Red; Copper: 70um; Object: ExistsOnLayer" [ExistsOnLayer('70um Layer Top or Bottom') or ExistsOnLayer('70um Layer Bottom or Top')] p10 off: expansion=0.05 istentingtop=FALSE
SolderMaskExpansion "SolderMaskExpansion; Rezonit; Advanced; Green, Blue, Red; Copper: 35um; Object: ExistsOnLayer" [ExistsOnLayer('35um Layer Top or Bottom') or ExistsOnLayer('35um Layer Bottom or Top')] p11 off: expansion=0.025 istentingtop=FALSE
SolderMaskExpansion "SolderMaskExpansion; Rezonit; Advanced; Green, Blue, Red; Copper: 18um; Object: ExistsOnLayer" [ExistsOnLayer('18um Layer Top or Bottom') or ExistsOnLayer('18um Layer Bottom or Top')] p12: expansion=0.025 istentingtop=FALSE
SolderMaskExpansion "SolderMaskExpansion; Rezonit; Advanced; Black, White; Copper: 105um; Object: Pad Non-Plated" [(IsPad = True) and (PadIsPlated = 'False')] p13 off: expansion=0.075 istentingtop=FALSE soldermaskfromhole=TRUE // Enable 1 of 4 Rules
SolderMaskExpansion "SolderMaskExpansion; Rezonit; Advanced; Black, White; Copper: 70um; Object: Pad Non-Plated" [(IsPad = True) and (PadIsPlated = 'False')] p14 off: expansion=0.075 istentingtop=FALSE soldermaskfromhole=TRUE // Enable 1 of 4 Rules
SolderMaskExpansion "SolderMaskExpansion; Rezonit; Advanced; Black, White; Copper: 35um; Object: Pad Non-Plated" [(IsPad = True) and (PadIsPlated = 'False')] p15 off: expansion=0.05 istentingtop=FALSE soldermaskfromhole=TRUE // Enable 1 of 4 Rules
SolderMaskExpansion "SolderMaskExpansion; Rezonit; Advanced; Black, White; Copper: 18um; Object: Pad Non-Plated" [(IsPad = True) and (PadIsPlated = 'False')] p16 off: expansion=0.05 istentingtop=FALSE soldermaskfromhole=TRUE // Enable 1 of 4 Rules
SolderMaskExpansion "SolderMaskExpansion; Rezonit; Advanced; Black, White; Copper: 105um; Object: Multi-Layer" [OnLayer('Multi-Layer')] p17 off: expansion=0.075 istentingtop=FALSE // Multi-Layer bug; Enable 1 of 4 Rules
SolderMaskExpansion "SolderMaskExpansion; Rezonit; Advanced; Black, White; Copper: 70um; Object: Multi-Layer" [OnLayer('Multi-Layer')] p18 off: expansion=0.075 istentingtop=FALSE // Multi-Layer bug; Enable 1 of 4 Rules
SolderMaskExpansion "SolderMaskExpansion; Rezonit; Advanced; Black, White; Copper: 35um; Object: Multi-Layer" [OnLayer('Multi-Layer')] p19 off: expansion=0.05 istentingtop=FALSE // Multi-Layer bug; Enable 1 of 4 Rules
SolderMaskExpansion "SolderMaskExpansion; Rezonit; Advanced; Black, White; Copper: 18um; Object: Multi-Layer" [OnLayer('Multi-Layer')] p20 off: expansion=0.05 istentingtop=FALSE // Multi-Layer bug; Enable 1 of 4 Rules
SolderMaskExpansion "SolderMaskExpansion; Rezonit; Advanced; Black, White; Copper: 105um; Object: ExistsOnLayer" [ExistsOnLayer('105um Layer Top or Bottom') or ExistsOnLayer('105um Layer Bottom or Top')] p21 off: expansion=0.075 istentingtop=FALSE
SolderMaskExpansion "SolderMaskExpansion; Rezonit; Advanced; Black, White; Copper: 70um; Object: ExistsOnLayer" [ExistsOnLayer('70um Layer Top or Bottom') or ExistsOnLayer('70um Layer Bottom or Top')] p22 off: expansion=0.075 istentingtop=FALSE
SolderMaskExpansion "SolderMaskExpansion; Rezonit; Advanced; Black, White; Copper: 35um; Object: ExistsOnLayer" [ExistsOnLayer('35um Layer Top or Bottom') or ExistsOnLayer('35um Layer Bottom or Top')] p23 off: expansion=0.05 istentingtop=FALSE
SolderMaskExpansion "SolderMaskExpansion; Custom; Object: VIA; Constraints: Tented" [isVia] p24: expansion=0.05 istentingtop=TRUE
SolderMaskExpansion "SolderMaskExpansion; Rezonit; Advanced; Black, White; Copper: 18um; Object: ExistsOnLayer" [ExistsOnLayer('18um Layer Top or Bottom') or ExistsOnLayer('18um Layer Bottom or Top')] p25 off: expansion=0.05 istentingtop=FALSE
SolderMaskExpansion "SolderMaskExpansion; Rezonit; Standard; Green; Copper: 105um; Object: Pad Non Plated" [(IsPad = True) and (PadIsPlated = 'False')] p26 off: expansion=0.075 istentingtop=FALSE soldermaskfromhole=TRUE // Enable 1 of 4 Rules
SolderMaskExpansion "SolderMaskExpansion; Rezonit; Standard; Green; Copper: 70um; Object: Pad Non Plated" [(IsPad = True) and (PadIsPlated = 'False')] p27 off: expansion=0.075 istentingtop=FALSE soldermaskfromhole=TRUE // Enable 1 of 4 Rules
SolderMaskExpansion "SolderMaskExpansion; Rezonit; Standard; Green; Copper: 35um; Object: Pad Non Plated" [(IsPad = True) and (PadIsPlated = 'False')] p28 off: expansion=0.05 istentingtop=FALSE soldermaskfromhole=TRUE // Enable 1 of 4 Rules
SolderMaskExpansion "SolderMaskExpansion; Rezonit; Standard; Green; Copper: 18um; Object: Pad Non Plated" [(IsPad = True) and (PadIsPlated = 'False')] p29: expansion=0.05 istentingtop=FALSE soldermaskfromhole=TRUE // Enable 1 of 4 Rules
SolderMaskExpansion "SolderMaskExpansion; Rezonit; Standard; Green; Copper: 105um; Object: Multi-Layer" [OnLayer('Multi-Layer')] p30 off: expansion=0.075 istentingtop=FALSE // Multi-Layer bug
SolderMaskExpansion "SolderMaskExpansion; Rezonit; Standard; Green; Copper: 70um; Object: Multi-Layer" [OnLayer('Multi-Layer')] p31 off: expansion=0.075 istentingtop=FALSE // Multi-Layer bug
SolderMaskExpansion "SolderMaskExpansion; Rezonit; Standard; Green; Copper: 35um; Object: Multi-Layer" [OnLayer('Multi-Layer')] p32 off: expansion=0.05 istentingtop=FALSE // Multi-Layer bug
SolderMaskExpansion "SolderMaskExpansion; Rezonit; Standard; Green; Copper: 18um; Object: Multi-Layer" [OnLayer('Multi-Layer')] p33: expansion=0.05 istentingtop=FALSE // Multi-Layer bug
SolderMaskExpansion "SolderMaskExpansion; Rezonit; Standard; Green; Copper: 105um; Object: ExistsOnLayer" [ExistsOnLayer('105um Layer Top or Bottom') or ExistsOnLayer('105um Layer Bottom or Top')] p34 off: expansion=0.075 istentingtop=FALSE
SolderMaskExpansion "SolderMaskExpansion; Rezonit; Standard; Green; Copper: 70um; Object: ExistsOnLayer" [ExistsOnLayer('70um Layer Top or Bottom') or ExistsOnLayer('70um Layer Bottom or Top')] p35 off: expansion=0.075 istentingtop=FALSE
SolderMaskExpansion "SolderMaskExpansion; Rezonit; Standard; Green; Copper: 35um; Object: ExistsOnLayer" [ExistsOnLayer('35um Layer Top or Bottom') or ExistsOnLayer('35um Layer Bottom or Top')] p36 off: expansion=0.05 istentingtop=FALSE
SolderMaskExpansion "SolderMaskExpansion; Rezonit; Standard; Green; Copper: 18um; Object: ExistsOnLayer" [ExistsOnLayer('18um Layer Top or Bottom') or ExistsOnLayer('18um Layer Bottom or Top')] p37: expansion=0.05 istentingtop=FALSE
SolderMaskExpansion "SolderMaskExpansion; Rezonit; Standard; Color; Copper: 105um; Object: Pad Non-Plated" [(IsPad = True) and (PadIsPlated = 'False')] p38 off: expansion=0.075 istentingtop=FALSE soldermaskfromhole=TRUE
SolderMaskExpansion "SolderMaskExpansion; Rezonit; Standard; Color; Copper: 70um; Object: Pad Non-Plated" [(IsPad = True) and (PadIsPlated = 'False')] p39 off: expansion=0.075 istentingtop=FALSE soldermaskfromhole=TRUE
SolderMaskExpansion "SolderMaskExpansion; Rezonit; Standard; Color; Copper: 35um; Object: Pad Non-Plated" [(IsPad = True) and (PadIsPlated = 'False')] p40 off: expansion=0.05 istentingtop=FALSE soldermaskfromhole=TRUE
SolderMaskExpansion "SolderMaskExpansion; Rezonit; Standard; ?olor; Copper: 18um; Object: Pad Non-Plated" [(IsPad = True) and (PadIsPlated = 'False')] p41 off: expansion=0.05 istentingtop=FALSE soldermaskfromhole=TRUE
SolderMaskExpansion "SolderMaskExpansion; Rezonit; Standard; Color; Copper: 105um; Object: Multi-Layer" [OnLayer('Multi-Layer')] p42 off: expansion=0.075 istentingtop=FALSE // Multi-Layer bug
SolderMaskExpansion "SolderMaskExpansion; Rezonit; Standard; Color; Copper: 70um; Object: Multi-Layer" [OnLayer('Multi-Layer')] p43 off: expansion=0.075 istentingtop=FALSE // Multi-Layer bug
SolderMaskExpansion "SolderMaskExpansion; Rezonit; Standard; Color; Copper: 35um; Object: Multi-Layer" [OnLayer('Multi-Layer')] p44 off: expansion=0.05 istentingtop=FALSE // Multi-Layer bug
SolderMaskExpansion "SolderMaskExpansion; Rezonit; Standard; Color; Copper: 18um; Object: Multi-Layer" [OnLayer('Multi-Layer')] p45 off: expansion=0.05 istentingtop=FALSE // Multi-Layer bug
SolderMaskExpansion "SolderMaskExpansion; Rezonit; Standard; Color; Copper: 105um; Object: ExistsOnLayer" [ExistsOnLayer('105um Layer Top or Bottom') or ExistsOnLayer('105um Layer Bottom or Top')] p46 off: expansion=0.075 istentingtop=FALSE
SolderMaskExpansion "SolderMaskExpansion; Rezonit; Standard; Color; Copper: 70um; Object: ExistsOnLayer" [ExistsOnLayer('70um Layer Top or Bottom') or ExistsOnLayer('70um Layer Bottom or Top')] p47 off: expansion=0.075 istentingtop=FALSE
SolderMaskExpansion "SolderMaskExpansion; Rezonit; Standard; Color; Copper: 35um; Object: ExistsOnLayer" [ExistsOnLayer('35um Layer Top or Bottom') or ExistsOnLayer('35um Layer Bottom or Top')] p48 off: expansion=0.05 istentingtop=FALSE
SolderMaskExpansion "SolderMaskExpansion; Rezonit; Standard; Color; Copper: 18um; Object: ExistsOnLayer" [ExistsOnLayer('18um Layer Top or Bottom') or ExistsOnLayer('18um Layer Bottom or Top')] p49 off: expansion=0.05 istentingtop=FALSE
UnRoutedNet "UnRoutedNet; Custom; Object: All; Constraints: Check" [All] p1: checkbadconnections=TRUE
UnRoutedNet [All] p2: checkbadconnections=TRUE
UnpouredPolygon "UnpouredPolygon; Custom; Object: All; Contraints: Repour Always" [All] p1:
UnpouredPolygon [All] p2:
Width "Width; Rezonit; Advanced; Copper: 105um; Object: ExistsOnLayer" [( ExistsOnLayer('105um Layer <N>') or ExistsOnLayer('105um Layer <M>') )] p1 off: maxlimit=10 minlimit=0.35 preferedwidth=0.4 toplayer_prefwidth=0.35 midlayer1_prefwidth=0.35 midlayer2_prefwidth=0.35 bottomlayer_prefwidth=0.35 minimp=50.000000 maximp=50.000000 favimp=50.000000 checkconnectedcopper=TRUE
Width "Width; Rezonit; Advanced; Copper: 70um; Object: ExistsOnLayer" [( ExistsOnLayer('70um Layer <N>') or ExistsOnLayer('70um Layer <M>') )] p2 off: maxlimit=10 minlimit=0.3 preferedwidth=0.35 toplayer_prefwidth=0.3 midlayer1_prefwidth=0.3 midlayer2_prefwidth=0.3 bottomlayer_prefwidth=0.3 minimp=50.000000 maximp=50.000000 favimp=50.000000 checkconnectedcopper=TRUE
Width "Width; Rezonit; Advanced; Copper: 35um; Object: ExistsOnLayer" [( ExistsOnLayer('35um Layer <N>') or ExistsOnLayer('35um Layer <M>') )] p3 off: maxlimit=10 minlimit=0.15 preferedwidth=0.2 toplayer_prefwidth=0.15 midlayer1_prefwidth=0.15 midlayer2_prefwidth=0.15 bottomlayer_prefwidth=0.15 minimp=50.000000 maximp=50.000000 favimp=50.000000 checkconnectedcopper=TRUE
Width "Width; Custom; Z0=50; Object: All" [All] p4: maxlimit=0.254 minlimit=0.1 preferedwidth=0.254 toplayer_maxwidth=0.173 toplayer_prefwidth=0.173 midlayer2_maxwidth=0.125 midlayer2_prefwidth=0.125 midlayer11_maxwidth=0.125 midlayer11_prefwidth=0.125 bottomlayer_maxwidth=0.173 bottomlayer_prefwidth=0.173 impedanceprofiledriven=TRUE impedanceprofileid={151F4F01-35E9-4EDA-B677-327C60A5C6EE} impedanceprofilevalue=50.000000 minimp=50.000000 maximp=50.000000 favimp=50.000000 // keep "Min Width" equal to technology "Min Width"
Width "Width; Rezonit; Advanced; Copper: 18um; Object: ExistsOnLayer" [All] p5: maxlimit=10 minlimit=0.1 preferedwidth=0.125 toplayer_prefwidth=0.1 midlayer1_prefwidth=0.1 midlayer2_prefwidth=0.1 bottomlayer_prefwidth=0.1 minimp=50.000000 maximp=50.000000 favimp=50.000000 checkconnectedcopper=TRUE
Width "Width; Rezonit; Standard; Copper: 105um; Object: ExistsOnLayer" [( ExistsOnLayer('105um Layer 1') or ExistsOnLayer('105um Layer 2') )] p6 off: maxlimit=10 minlimit=0.35 preferedwidth=0.4 toplayer_prefwidth=0.35 midlayer1_prefwidth=0.35 midlayer2_prefwidth=0.35 bottomlayer_prefwidth=0.35 minimp=50.000000 maximp=50.000000 favimp=50.000000 checkconnectedcopper=TRUE
Width "Width; Rezonit; Standard; Copper: 70um; Object: ExistsOnLayer" [( ExistsOnLayer('70um Layer 1') or ExistsOnLayer('70um Layer 2') )] p7 off: maxlimit=10 minlimit=0.3 preferedwidth=0.35 toplayer_prefwidth=0.3 midlayer1_prefwidth=0.3 midlayer2_prefwidth=0.3 bottomlayer_prefwidth=0.3 minimp=50.000000 maximp=50.000000 favimp=50.000000 checkconnectedcopper=TRUE
Width "Width; Rezonit; Standard; Copper: 35um; Object: ExistsOnLayer" [( ExistsOnLayer('35um Layer 1') or ExistsOnLayer('35um Layer 2') )] p8 off: maxlimit=10 minlimit=0.15 preferedwidth=0.2 toplayer_minwidth=0.2 midlayer1_minwidth=0.2 midlayer2_minwidth=0.2 bottomlayer_minwidth=0.2 minimp=50.000000 maximp=50.000000 favimp=50.000000 checkconnectedcopper=TRUE
Width "Width; Rezonit; Standard; Copper: 18um; Object: ExistsOnLayer" [( ExistsOnLayer('18um Layer 1') or ExistsOnLayer('18um Layer 2') )] p9 off: maxlimit=100 minlimit=0.1 preferedwidth=0.125 toplayer_minwidth=0.125 midlayer1_minwidth=0.125 midlayer1_maxwidth=10 midlayer2_minwidth=0.125 midlayer2_maxwidth=10 midlayer6_maxwidth=10 midlayer10_maxwidth=10 midlayer11_maxwidth=10 midlayer12_maxwidth=10 bottomlayer_minwidth=0.125 minimp=50.000000 maximp=50.000000 favimp=50.000000 checkconnectedcopper=TRUE
1 further rules are at their usual default settings.

## Classes and differential pairs
differential pair class CSI-2: MIPI_CSI_CLK_10 MIPI_CSI_D0_10 MIPI_CSI_D1_10 MIPI_CSI_D2_10 MIPI_CSI_D3_10
differential pair MIPI_CSI_D3_10: +MIPI_CSI_D3_10_p -MIPI_CSI_D3_10_n
differential pair MIPI_CSI_D2_10: +MIPI_CSI_D2_10_p -MIPI_CSI_D2_10_n
differential pair MIPI_CSI_D1_10: +MIPI_CSI_D1_10_p -MIPI_CSI_D1_10_n
differential pair MIPI_CSI_D0_10: +MIPI_CSI_D0_10_p -MIPI_CSI_D0_10_n
differential pair MIPI_CSI_CLK_10: +MIPI_CSI_CLK_10_p -MIPI_CSI_CLK_10_n

## Components (designator, comment, footprint, x,y, rotation, side; value= is the part's Value field where it differs from the comment)
C1 "GRM033Z71C104KE14" "CAPC_0.63x0.33x0.33Body; IPC: N; Pad Gap: 0.25" 141.063,20.381 r0 top value=100nF
C2 "GRM033Z71C104KE14" "CAPC_0.63x0.33x0.33Body; IPC: N; Pad Gap: 0.25" 109.161,20.381 r0 top value=100nF
C3 "GRM033Z71C104KE14" "CAPC_0.63x0.33x0.33Body; IPC: N; Pad Gap: 0.25" 136.763,20.381 r0 top value=100nF
C4 "GRM033Z71C104KE14" "CAPC_0.63x0.33x0.33Body; IPC: N; Pad Gap: 0.25" 118.812,20.381 r0 top value=100nF
C5 "GRM033Z71C104KE14" "CAPC_0.63x0.33x0.33Body; IPC: N; Pad Gap: 0.25" 104.836,20.381 r0 top value=100nF
C6 "GRM033Z71C104KE14" "CAPC_0.63x0.33x0.33Body; IPC: N; Pad Gap: 0.25" 150.213,20.381 r0 top value=100nF
C7 "GRM033Z71C104KE14" "CAPC_0.63x0.33x0.33Body; IPC: N; Pad Gap: 0.25" 154.539,20.381 r0 top value=100nF
C8 "1uF" C0603 183.465,4.33 r0 top
C9 "1uF" C0603 148.663,4.33 r0 top
C10 "1uF" C0603 111.337,3.555 r90 top
C11 "100nF" C0603 187.765,4.33 r0 top
C12 "100nF" C0603 152.214,3.555 r90 top
C13 "100nF" C0603 116.912,3.555 r90 top
C14 "2.2uF" C0603 192.09,3.555 r90 top
C15 "2.2uF" C0603 157.814,3.555 r90 top
C16 "2.2uF" C0603 122.512,3.555 r90 top
D1 "TPS74501PDRV" "WSON6_2.1x2.1x0.8Body; Recommended: Texas Instruments" 209.416,3.755 r0 top
D2 "TPS74501PDRV" "WSON6_2.1x2.1x0.8Body; Recommended: Texas Instruments" 174.615,3.755 r0 top
D3 "TPS74501PDRV" "WSON6_2.1x2.1x0.8Body; Recommended: Texas Instruments" 139.838,3.755 r0 top
J1 "1761987-2" "CON: 36_1761987-2_TEC" 6.425,17.95 r270 top
JT1 "NetTie" "CON: nettie_0.8" 95.486,3.28 r90 top net-tie
JT2 "NetTie" "CON: nettie_0.8" 83.785,3.28 r90 top net-tie
JT3 "NetTie" "CON: nettie_0.8" 89.635,3.28 r90 top net-tie
JT4 "NetTie" "CON: nettie_0.8" 100.811,3.28 r90 top net-tie
R1 "0R" R0603 168.314,19.956 r0 top
R2 "0R NP" R0603 176.915,19.956 r0 top
R3 "10k" R0603 159.689,19.956 r0 top
R4 "10k" R0603 181.24,19.956 r0 top
R5 "0R" R0603 164.014,19.956 r0 top
R6 "0R" R0603 172.615,19.956 r0 top
R7 "10k" R0603 179.14,4.33 r0 top
R8 "10k" R0603 144.338,4.33 r0 top
R9 "10k" R0603 107.786,4.33 r0 top
R10 "11k8" R0603 197.691,3.555 r90 top
R11 "22k6" R0603 164.164,4.33 r0 top
R12 "41k2" R0603 128.087,3.555 r90 top
R13 "10k" R0603 203.266,3.555 r90 top
R14 "10k" R0603 168.464,3.555 r90 top
R15 "10k" R0603 133.688,3.555 r90 top
TP1 "TESTPOINT" TP 145.463,19.431 r0 top
U2 "OV4689" 81-BGA-OMNIVISION4669 14.95,11.5 r270 bottom
VD1 "ESD8104MUTAG" "UDFN10_1.0x2.5x0.55Body; Recommended: onsemi" 113.562,19.131 r0 top
VD2 "ESD8104MUTAG" "UDFN10_1.0x2.5x0.55Body; Recommended: onsemi" 89.985,19.131 r0 top
VD3 "ESD8104MUTAG" "UDFN10_1.0x2.5x0.55Body; Recommended: onsemi" 84.135,19.131 r0 top
X1 "ECS-1612MV-240-CN-TR" DFN1.6X1.2 84.885,2.655 r0 top

## Footprints (in the part's own frame and the unit in brackets; to place one, negate y for a bottom-side part, rotate by r counter-clockwise, add the part's x,y. Pads: shape width x height; smd on the part's side, far side on the other; paste and mask are expansions set on the pad)
81-BGA-OMNIVISION4669 [mm] "BGA, 81-Leads, Body 6,63x5,83mmx0,61mm, Pitch 0,58mm"
  round 0.2 smd: A1(-2.84,2.32) A2(-2.13,2.32) A3(-1.42,2.32) A4(-0.71,2.32) A5(0,2.32) A6(0.71,2.32) A7(1.42,2.32) A8(2.13,2.32) A9(2.84,2.32) B1(-2.84,1.74) B2(-2.13,1.74) B3(-1.42,1.74) B4(-0.71,1.74) B5(0,1.74) B6(0.71,1.74) B7(1.42,1.74) B8(2.13,1.74) B9(2.84,1.74) C1(-2.84,1.16) C2(-2.13,1.16) C3(-1.42,1.16) C4(-0.71,1.16) C5(0,1.16) C6(0.71,1.16) C7(1.42,1.16) C8(2.13,1.16) C9(2.84,1.16) D1(-2.84,0.58) D9(2.84,0.58) E1(-2.84,0) E9(2.84,0) F1(-2.84,-0.58) F2(-2.13,-0.58) F3(-1.42,-0.58) F4(-0.71,-0.58) F5(0,-0.58) F6(0.71,-0.58) F7(1.42,-0.58) F8(2.13,-0.58) F9(2.84,-0.58) G1(-2.84,-1.16) G2(-2.13,-1.16) G3(-1.42,-1.16) G4(-0.71,-1.16) G5(0,-1.16) G6(0.71,-1.16) G7(1.42,-1.16) G8(2.13,-1.16) G9(2.84,-1.16) H1(-2.84,-1.74) H2(-2.13,-1.74) H3(-1.42,-1.74) H4(-0.71,-1.74) H5(0,-1.74) H6(0.71,-1.74) H7(1.42,-1.74) H8(2.13,-1.74) H9(2.84,-1.74) J1(-2.84,-2.32) J2(-2.13,-2.32) J3(-1.42,-2.32) J4(-0.71,-2.32) J5(0,-2.32) J6(0.71,-2.32) J7(1.42,-2.32) J8(2.13,-2.32) J9(2.84,-2.32)
  silkscreen extent -4.1,-2.93 3.32,2.93, body extent -3.31,-2.92 3.31,2.92, height 0.61
C0603 [mm]
  rect 0.85x0.8 smd: 1(-0.725,0) 2(0.725,0)
  silkscreen extent -1.4,-0.65 1.4,0.65, body extent -0.8,-0.4 0.8,0.4, height 0.8
"CAPC_0.63x0.33x0.33Body; IPC: N; Pad Gap: 0.25" [mm] "0201; IPC Medium Density"
  rrect50% 0.435x0.42 smd: 1(-0.343,0) 2(0.343,0)
  silkscreen extent 0,-0.17 0,0.16, body extent -0.32,-0.17 0.32,0.17, height 0.33
"CON: 36_1761987-2_TEC" [mil]
  round 63 hole 63 unplated: 37(-55.12,-203.94) 38(574.8,-203.94)
  oval 14x71 smd paste+0 mask+1.97: A1(0,0) A2(31.5,0) A3(62.99,0) A4(94.49,0) A5(125.98,0) A6(157.48,0) A7(188.98,0) A8(220.47,0) A9(251.97,0) A10(283.46,0) A11(314.96,0) A12(346.46,0) A13(377.95,0) A14(409.45,0) A15(440.94,0) A16(472.44,0) A17(503.94,0) A18(535.43,0) B1(-15.75,98.82) B2(15.75,98.82) B3(47.24,98.82) B4(78.74,98.82) B5(110.24,98.82) B6(141.73,98.82) B7(173.23,98.82) B8(204.72,98.82) B9(236.22,98.82) B10(267.72,98.82) B11(299.21,98.82) B12(330.71,98.82) B13(362.2,98.82) B14(393.7,98.82) B15(425.2,98.82) B16(456.69,98.82) B17(488.19,98.82) B18(519.68,98.82)
  silkscreen extent -128,-323 607,148, body extent -83,-319 602,147, height 213
"CON: nettie_0.8" [mm]
  rect 1.6x0.8 smd paste+0 mask+0: 1(-1,0)
  rect 1.6x0.8 smd mask+0: 2(1,0)
  Top Layer lines w0.8: -1,0 1,0